# EAGLE board countdown_panelized (EAGLE 9.6.1)
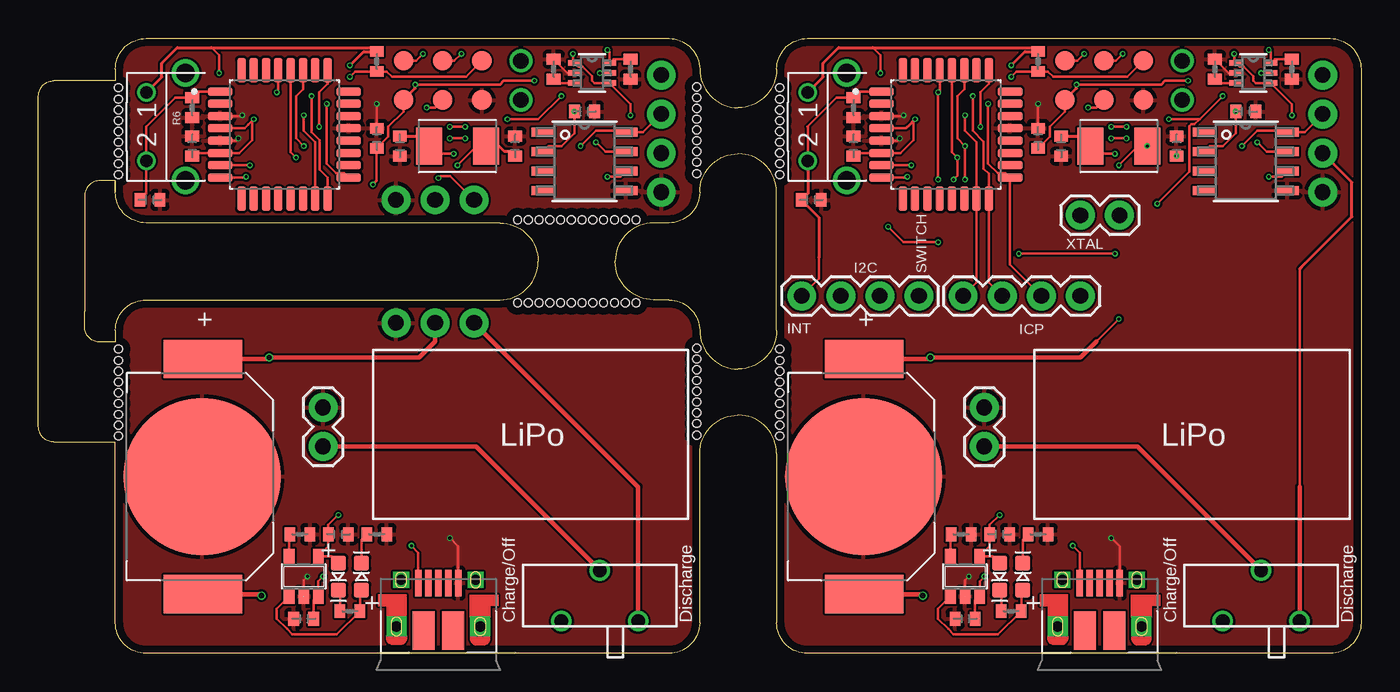
[diagram p0: board, top side]
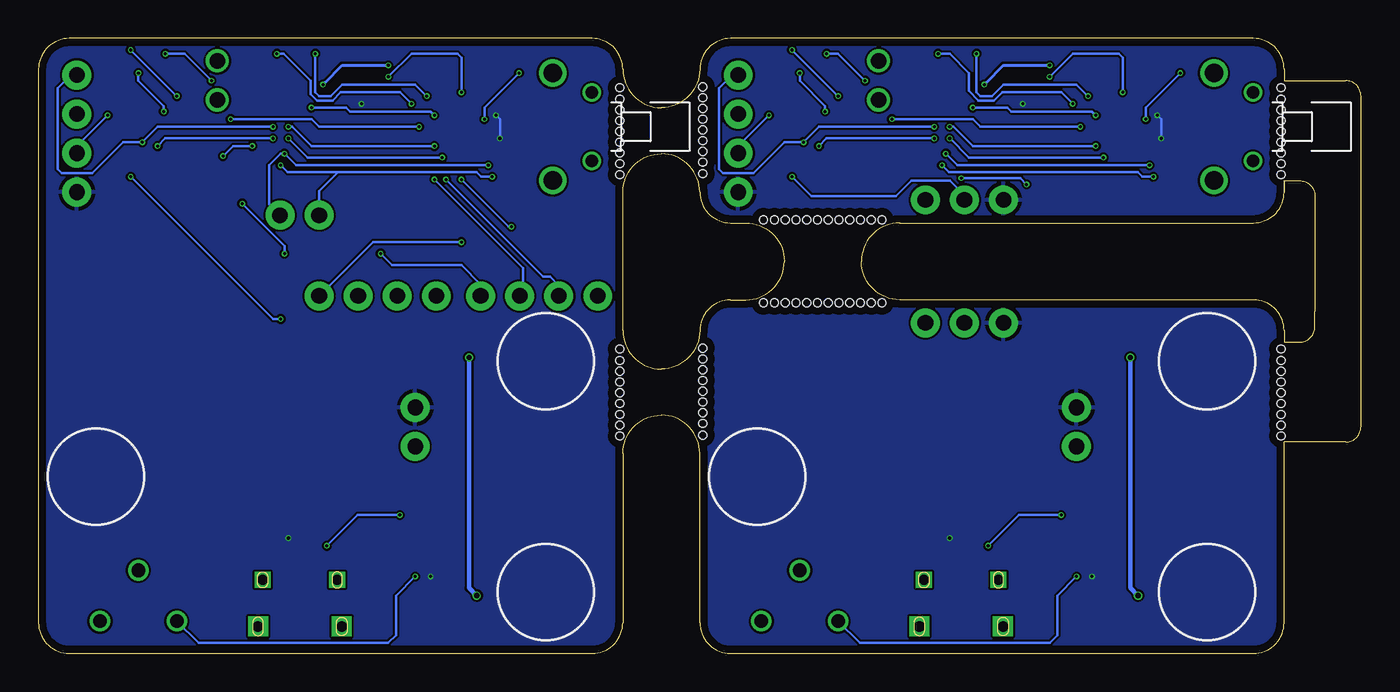
[diagram p1: board, bottom side, seen from below]

Size 86 x 40 mm. Coordinates in mm from the lower left corner, seen from the top.
Outline: 5,30 arc90 7,28 30,28 arc-90 32.5,25.5 arc-90 30,23 7,23 arc90 5,21 5,20.25 4,20.25 arc-90 3,21.25 3,22.25 3,29 3,29.75 arc-90 4,30.75 5,30.75
Outline: 5,30 5,30.75
Outline: 5,30.75 5,30
Outline: 48,30 arc90 45.5,32.5 arc90 43,30 arc-90 41,28 40,28 arc90 37.5,25.5 arc90 40,23 41,23 arc-90 43,21 arc90 45.5,18.5 arc90 48,21 48,30
Outline: 48,38 arc-90 45.5,35.5 arc-90 43,38 arc90 41,40 7,40 arc90 5,38 5,37.25 1,37.25 arc90 0,36.25 0,14.75 arc90 1,13.75 5,13.75 5,2 arc90 7,0 41,0 arc90 43,2 43,13 arc-90 45.5,15.5 arc-90 48,13 48,2 arc90 50,0 84,0 arc90 86,2 86,21 86,38 arc90 84,40 50,40 arc90 48,38
Copper layers (1*16): Top 2mil / dielectric 9mil / Bottom 2mil
Design rules "scono": minimum track width 3.5mil, minimum drill 0.2mm, track to track 5.5mil, track to pad 5.5mil, pad to pad 5.5mil, via to via 5.5mil, smd to smd 0mil, copper to edge 0.5mm, drill to drill 0.5mm, minimum pad ring 3mil, minimum via ring 3mil, stop-mask expansion 3mil, vias tented up to drill 0mil, thermal gap 10mil
Holes 0.5 mm at 48.2,36.05 48.2,33.25 48.2,33.95 48.2,34.65 48.2,35.35 48.2,32.55 48.2,31.15 48.2,31.85 48.2,36.8 42.8,31.95 42.8,34.75 42.8,34.05 42.8,33.35 42.8,32.65 42.8,35.45 42.8,36.85 42.8,36.15 42.8,31.2 33.25,28.2 32.55,28.2 31.85,28.2 31.15,28.2 33.95,28.2 36.75,28.2 36.05,28.2 35.35,28.2 34.65,28.2 37.45,28.2 38.85,28.2 38.15,28.2 36.75,22.8 37.45,22.8 38.15,22.8 38.85,22.8 36.05,22.8 33.25,22.8 33.95,22.8 34.65,22.8 35.35,22.8 32.55,22.8 31.15,22.8 31.85,22.8 48.2,19.05 48.2,16.25 48.2,16.95 48.2,17.65 48.2,18.35 48.2,15.55 48.2,14.15 48.2,14.85 48.2,19.8 42.8,14.95 42.8,17.75 42.8,17.05 42.8,16.35 42.8,15.65 42.8,18.45 42.8,19.85 42.8,19.15 42.8,14.2 5.2,36.05 5.2,33.25 5.2,33.95 5.2,34.65 5.2,35.35 5.2,32.55 5.2,31.15 5.2,31.85 5.2,36.8 5.2,19.05 5.2,16.25 5.2,16.95 5.2,17.65 5.2,18.35 5.2,15.55 5.2,14.15 5.2,14.85 5.2,19.8

## Footprints (pad centres in the part's own frame; a part is rotated, then mirrored left to right if it is on the bottom)
BAT_BK-916-TR = smd 2.5 x 5.1: 1 -7.65,0.05; 2 7.65,0.05 | smd 10.2 x 10.2: 3 0,0
0402-CAP = smd 0.7 x 0.9: 1 -0.65,0; 2 0.65,0
LED-0603 = smd 1 x 1: A 0.877,0; C -0.877,0
BURNIN = smd 1.27 x 1.27 bottom: 3.3V 0,0; GND -5.08,0; MISO 0,2.54; MOSI -2.54,0; RST -5.08,2.54; SCK -2.54,2.54 | drill 1: P$7 -7.62,2.54; P$8 -7.62,0
FCI_10103594-0001LF = smd 0.4 x 1.75: 1 -1.3,2.825; 2 -0.65,2.825; 3 0,2.825; 4 0.65,2.825; 5 1.3,2.825 | smd 1.425 x 2.5: S1 -0.963,-0.25; S2 0.963,-0.25 | drill 0.65 pad 1.05 square: S3 -2.425,3.03; S4 2.425,3.03 | drill 0.7 pad 1.3 square: S5 -2.725,0; S6 2.725,0
1X02 = drill 1.016 pad 1.88: 1 0,0; 2 2.54,0
1X04_NO_SILK = drill 1.016 pad 1.88: 1 0,0; 2 2.54,0; 3 5.08,0; 4 7.62,0
1X03_NO_SILK = drill 1.016 pad 1.88: 1 0,0; 2 2.54,0; 3 5.08,0
1X04 = drill 1.016 pad 1.88: 1 0,0; 2 2.54,0; 3 5.08,0; 4 7.62,0
R0402 = smd 0.7 x 0.9: 1 -0.65,0; 2 0.65,0
FSMRACD = drill 1.2: GND1 0,3.81; GND2 6.985,3.81 | drill 0.8: P$1 1.27,1.27; P$2 5.715,1.27
SOIC-8 = smd 1.493 x 0.568: 1 -2.702,1.905; 2 -2.702,0.635; 3 -2.702,-0.635; 4 -2.702,-1.905; 5 2.702,-1.905; 6 2.702,-0.635; 7 2.702,0.635; 8 2.702,1.905
QFP80P900X900X120-32N = smd 1.6 x 0.55: 1 -4.18,2.8; 2 -4.18,2; 3 -4.18,1.2; 4 -4.18,0.4; 5 -4.18,-0.4; 6 -4.18,-1.2; 7 -4.18,-2; 8 -4.18,-2.8; 17 4.18,-2.8; 18 4.18,-2; 19 4.18,-1.2; 20 4.18,-0.4; 21 4.18,0.4; 22 4.18,1.2; 23 4.18,2; 24 4.18,2.8 | smd 0.55 x 1.6: 9 -2.8,-4.18; 10 -2,-4.18; 11 -1.2,-4.18; 12 -0.4,-4.18; 13 0.4,-4.18; 14 1.2,-4.18; 15 2,-4.18; 16 2.8,-4.18; 25 2.8,4.18; 26 2,4.18; 27 1.2,4.18; 28 0.4,4.18; 29 -0.4,4.18; 30 -1.2,4.18; 31 -2,4.18; 32 -2.8,4.18
SOT-23-5 = smd 0.69 x 0.99: 1 -0.95,-1.29; 2 0,-1.29; 3 0.95,-1.29; 4 0.95,1.3; 5 -0.95,1.3
SOT-363 = smd 0.845 x 0.365: 1 -1.134,0.65; 2 -1.134,0; 3 -1.134,-0.65; 4 1.134,-0.65; 5 1.134,0; 6 1.134,0.65
12C-12 = drill 0.9: 1 -2.5,1.65; 2 0,-1.65; 3 2.5,1.65
XTAL500X320X130N = smd 1.7 x 2.4: 1 -1.85,0; 2 1.85,0

## Placement (x,y rotation side)
BT1  BK-916-TR  [BAT_BK-916-TR]  10.65,11.5 270 top
BT2  BK-916-TR  [BAT_BK-916-TR]  53.65,11.5 270 top
C1  20pF  [0402-CAP]  23.5,33 90 top
C2  20pF  [0402-CAP]  31,33 270 top
C3  4.7uF  [0402-CAP]  17.25,2.25 0 top
C4  4.7uF  [0402-CAP]  19.5,7.75 180 top
C5  0.1uF  [0402-CAP]  22,33.5 270 top
C6  0.1uF  [0402-CAP]  10,33 270 top
C7  1uF  [0402-CAP]  35.5,35.25 180 top
C8  20pF  [0402-CAP]  66.5,33 90 top
C9  20pF  [0402-CAP]  74,33 270 top
C10  0.1uF  [0402-CAP]  65,33.5 270 top
C11  0.1uF  [0402-CAP]  53,33 270 top
C12  1uF  [0402-CAP]  78.5,35.25 180 top
C13  4.7uF  [0402-CAP]  60.25,2.25 0 top
C14  4.7uF  [0402-CAP]  62.5,7.75 180 top
C15  0.1uF  [0402-CAP]  7.25,29.5 180 top
C16  0.1uF  [0402-CAP]  50.25,29.5 180 top
D1  [LED-0603]  19.5,5 90 top
D2  [LED-0603]  21,5 270 top
D3  [LED-0603]  62.5,5 90 top
D4  [LED-0603]  64,5 270 top
J1  BURNIN  [BURNIN]  23.75,36 0 bottom
J2  USB  [FCI_10103594-0001LF]  26,1.75 0 top
J3  LiPo  [1X02]  18.5,16 270 top
J4  OLED  [1X04_NO_SILK]  40.5,30 90 top
J5  TOP  [1X03_NO_SILK]  23.25,29.5 0 top
J6  BASE  [1X03_NO_SILK]  23.25,21.5 0 top
J7  BURNIN  [BURNIN]  66.75,36 0 bottom
J8  OLED  [1X04_NO_SILK]  83.5,30 90 top
J9  [1X02]  67.75,28.5 0 top
J10  [1X04]  57.25,23.25 180 top
J11  [1X04]  67.75,23.25 180 top
J12  USB  [FCI_10103594-0001LF]  69,1.75 0 top
J13  LiPo  [1X02]  61.5,16 270 top
R1  330R  [R0402]  20.25,2.75 180 top
R2  51k  [R0402]  17,7.75 180 top
R3  1k  [R0402]  22,38.5 270 top
R4  10k  [R0402]  38.5,38 270 top
R5  10k  [R0402]  33.5,38 90 top
R6  10k  [R0402]  10,35.5 90 top
R7  330R  [R0402]  22,7.75 180 top
R8  1k  [R0402]  65,38.5 270 top
R9  10k  [R0402]  81.5,38 270 top
R10  10k  [R0402]  76.5,38 90 top
R11  10k  [R0402]  53,35.5 90 top
R12  330R  [R0402]  63.25,2.75 180 top
R13  51k  [R0402]  60,7.75 180 top
R14  330R  [R0402]  65,7.75 180 top
SW_INT  FSMRACD  [FSMRACD]  5.75,37.75 270 top
SW_INT1  FSMRACD  [FSMRACD]  48.75,37.75 270 top
U1  DS3231MZ+TRL_SOIC8  [SOIC-8]  35.5,32 0 top
U2  ATMEGA328P-AUR  [QFP80P900X900X120-32N]  16,33.75 0 top
U3  MCP73831T  [SOT-23-5]  17.25,5 0 top
U4  BL1551  [SOT-363]  36,37.75 0 top
U5  DS3231MZ+TRL_SOIC8  [SOIC-8]  78.5,32 0 top
U6  ATMEGA328P-AUR  [QFP80P900X900X120-32N]  59,33.75 0 top
U7  BL1551  [SOT-363]  79,37.75 0 top
U8  MCP73831T  [SOT-23-5]  60.25,5 0 top
U$1  CL-SB-12C-12  [12C-12]  36.5,3.75 180 top
U$2  CL-SB-12C-12  [12C-12]  79.5,3.75 180 top
Y1  [XTAL500X320X130N]  27.25,33 180 top
Y2  [XTAL500X320X130N]  70.25,33 180 top

## Library data of the parts
BT1 BT2 = scono; DESCRIPTION: Battery Retainer Coin, 12.0mm 1 Cell SMD _SMT_ Tab; DIGI-KEY_PART_NUMBER: BK-916-CT-ND; MF: MPD _Memory; MP: BK-916-TR; PACKAGE: MSOP-12 Memory Protection Devices
C1-C16 = scono; PIE-INT-REF-NUM: CAPACITOR-GENERIC
D1-D4 J1 J3 J5-J7 J9 J13 R1-R14 U1 U3-U5 U7 U8 U$1 U$2 Y1 Y2 = scono
J2 J12 = scono; DESCRIPTION: Micro Usb, 2.0 Type b, Receptacle, Smt; DIGI-KEY_PART_NUMBER: 609-4050-1-ND; DIGI-KEY_PURCHASE_URL: https://www.digikey.com/product-detail/en/amphenol-icc-fci/10103594-0001LF/609-4050-1-ND/2350357?utm_source=snapeda&utm_medium=aggregator&utm_campaign=symbol; MF: Amphenol ICC; MP: 10103594-0001LF; PACKAGE: None
J4 J8 J10 J11 = scono; PROD_ID: CONN-09696
SW_INT SW_INT1 = scono; COMMENT: 9-1437565-9; CONFIGURATION_POLE-THROW: Single Pole - Single Throw; CONTACT_CURRENT_RATING: 50 mA; DESCRIPTION: Tactile Switch SPST-NO Side Actuated Through Hole, Right Angle; DIGI-KEY_PART_NUMBER: 450-1178-ND; DIGIKEY-PURCHASE-URL: https://snapeda.com/shop?store=DigiKey&id=1919694; EU_ROHS_COMPLIANCE: Compliant; MF: TE Connectivity; MP: FSMRACD; PACKAGE: None
U2 U6 = scono; DESCRIPTION: ATmega328P Series 8 Bit 2 kB RAM 32 kB Flash SMT Microcontroller - TQFP-32; DIGI-KEY_PART_NUMBER: ATMEGA328P-AURCT-ND; DIGI-KEY_PURCHASE_URL: https://www.digikey.com/product-detail/en/microchip-technology/ATMEGA328P-AUR/ATMEGA328P-AURCT-ND/3789455?utm_source=snapeda&utm_medium=aggregator&utm_campaign=symbol; MF: Microchip; MP: ATMEGA328P-AUR; PACKAGE: TQFP-32 Microchip

## Nets
AREF: U2.20
AREF1: U6.20
AVCC: U2.18
AVCC1: U6.18
BAT+: J3.2 U$1.2
BAT+1: J13.2 U$2.2
EN_CLK: R4.1 U2.25 U4.6
EN_CLK1: J10.1 R9.1 U6.25 U7.6
GND: BT2.3 C8.1 C9.1 C10.1 C11.1 C12.1 C13.1 C14.1 C16.1 J7.GND J8.1 J12.5 J13.1 R9.2 R10.2 R11.1 R13.1 R14.1 U5.5 U6.3 U6.5 U6.21 U7.2 U8.2
GND_BOT: BT1.3 C3.1 C4.1 J2.5 J3.1 J6.1 R2.1 R7.1 U3.2
GND_TOP: C1.1 C2.1 C5.1 C6.1 C7.1 C15.1 J1.GND J4.1 J5.1 R4.2 R5.2 R6.1 U1.5 U2.3 U2.5 U2.21 U4.2
INT_WAKE: C15.2 R6.2 SW_INT.P$2 U2.1
INT_WAKE1: C16.2 J10.4 R11.2 SW_INT1.P$2 U6.1
MISO: J1.MISO U2.16
MISO1: J7.MISO J11.3 U6.16
MOSI: J1.MOSI U2.15
MOSI1: J7.MOSI J11.4 U6.15
N$1: R5.1 U4.3
N$2: D2.C R7.2
N$3: R10.1 U7.3
N$4: D1.C R1.2
N$5: D3.C R12.2
N$6: D4.C R14.2
PROG: R2.2 U3.5
PROG1: R13.2 U8.5
RST: J1.RST R3.2 U2.29
RST1: J7.RST J11.1 R8.2 U6.29
SCK: J1.SCK U2.17
SCK1: J7.SCK J11.2 U6.17
SCL: J4.3 U1.8 U2.28
SCL1: J8.3 J10.3 U5.8 U6.28
SDA: J4.4 U1.7 U2.27
SDA1: J8.4 J10.2 U5.7 U6.27
STAT: D2.A R1.1 U3.1
STAT1: D4.A R12.1 U8.1
V_BAT: BT2.1 BT2.2 U5.6
V_BAT_BOT: BT1.1 BT1.2 J6.2
V_BAT_TOP: J5.2 U1.6
VBAT_CHARGE: C3.2 U3.3 U$1.3
VBAT_CHARGE1: C13.2 U8.3 U$2.3
VCC: C10.2 C11.2 J7.3.3V J8.2 R8.1 SW_INT1.P$1 U6.4 U6.6 U7.1 U7.4 U$2.1
VCC_BOT: J6.3 U$1.1
VCC_CLK: C7.2 U1.2 U4.5
VCC_CLK1: C12.2 U5.2 U7.5
VCC_TOP: C5.2 C6.2 J1.3.3V J4.2 J5.3 R3.1 SW_INT.P$1 U2.4 U2.6 U4.1 U4.4
VUSB: C4.2 D1.A J2.1 U3.4
VUSB1: C14.2 D3.A J12.1 U8.4
XTAL1: C1.2 U2.7 Y1.2
XTAL2: C2.2 U2.8 Y1.1
XTAL3: C9.2 J9.1 U6.8 Y2.1
XTAL4: C8.2 J9.2 U6.7 Y2.2

## Tracks (layer width: path | path; a pad name or v marks a point on that pad's centre or on a via)
BAT+
  Top 0.3: J3.2 28.44,13.46 U$1.2
BAT+1
  Top 0.3: J13.2 71.44,13.46 U$2.2
EN_CLK  (via drill 0.2)
  Top 0.152: R4.1 37.38,38.65 U4.6 37.13,39.12 v37,39.25 | v34,36.25 32.5,34.75 v30.5,34.75 | U2.25 18.8,37.05 18.25,36.5 v18.25,34.25
  Bottom 0.152: v37,39.25 v34,36.25 | v30.5,34.75 25.25,34.75 24.75,34.25 v18.25,34.25
EN_CLK1  (via drill 0.2)
  Top 0.152: R9.1 80.38,38.65 U7.6 80.13,39.12 v80,39.25 | v77,36.25 75.5,34.75 | 75.5,34.75 74.75,34.75 v73.5,34.75 | U6.25 61.8,37.05 61.25,36.5 v61.25,34.25 | 75.5,34.75 75.17,34.42 74.96,34.42 74.82,34.28 74.82,31.32 v72.75,29.25 | v70,26 v63.75,26
  Bottom 0.152: v80,39.25 v77,36.25 | v73.5,34.75 68.25,34.75 67.75,34.25 v61.25,34.25 | v72.75,29.25 70,26.5 v70,26 | v63.75,26 63,25.25 58.5,25.25 57.25,24 J10.1
GND  (via drill 0.2)
  Top 0.152: C10.1 v65,35.75 | U7.2 77.4,37.75 R10.2 | U6.5 55.85,33.35 v56,33.5 | v56.25,35 56.2,34.95 U6.3 | J12.5 70.3,6.95 v69.75,7.5 | v60.5,5 60.25,4.75 U8.2
  Bottom 0.152: v56,33.5 56,34.75 v56.25,35
  pour Bottom: 48,40 86,40 86,0 48,0
  pour Top: 48,40 86,40 86,0 48,0
GND_BOT  (via drill 0.2)
  Top 0.152: J2.5 27.3,6.95 v26.75,7.5 | v17.5,5 17.25,4.75 U3.2
  pour Bottom: 5,23 43,23 43,0 5,0
  pour Top: 5,23 43,23 43,0 5,0
GND_TOP  (via drill 0.2)
  Top 0.152: C5.1 v22,35.75 | U4.2 34.4,37.75 R5.2 | U2.5 12.85,33.35 v13,33.5 | v13.25,35 13.2,34.95 U2.3
  Bottom 0.152: v13,33.5 13,34.75 v13.25,35
  pour Bottom: 5,40 43,40 43,28 5,28
  pour Top: 5,40 43,40 43,28 5,28
INT_WAKE
  Top 0.152: U2.1 10.4,36.55 R6.2 8.9,36.15 7,34.25 7.02,34.23 SW_INT.P$2 7.02,29.92 C15.2
INT_WAKE1
  Top 0.152: SW_INT1.P$2 50.02,34.23 50,34.25 51.9,36.15 R11.2 53.4,36.55 U6.1 | 50.75,25.75 50.75,24.37 J10.4
  Top 0.2: SW_INT1.P$2 50.02,29.92 C16.2 50.75,28.35 50.75,25.75
MISO  (via drill 0.2)
  Top 0.152: J1.MISO 24.54,38.54 v25,39 | U2.16 18.8,30.95 18.29,31.46 18.29,33.37 17.75,33.91 v17.75,36.25
  Bottom 0.152: v17.75,36.25 18.5,37 23.25,37 24,36.25 24.75,36.25 25,36.5 v25,39
MISO1  (via drill 0.2)
  Top 0.152: J7.MISO 67.54,38.54 v68,39 | v60.75,36.25 60.75,34 61.46,33.29 61.46,31.54 61.8,31.2 U6.16 61.8,24.12 J11.3
  Bottom 0.152: v60.75,36.25 61.5,37 66.25,37 67,36.25 67.75,36.25 68,36.5 v68,39
MOSI  (via drill 0.2)
  Top 0.152: J1.MOSI 25.79,35.5 v25.25,35.5 | U2.15 18,33.25 17.25,34 v17.25,35
  Bottom 0.152: v17.25,35 17.5,35.25 22.75,35.25 23,35.5 v25.25,35.5
MOSI1  (via drill 0.2)
  Top 0.152: J7.MOSI 68.79,35.5 v68.25,35.5 | v60.25,35 60.25,34 61,33.25 U6.15 61,24.12 J11.4
  Bottom 0.152: v60.25,35 60.5,35.25 65.75,35.25 66,35.5 v68.25,35.5
N$1
  Top 0.152: U4.3 33.75,37.1 R5.1
N$2
  Top 0.152: D2.C 21,7.4 R7.2
N$3
  Top 0.152: U7.3 76.75,37.1 R10.1
N$4
  Top 0.152: D1.C 19.56,4.06 19.6,4.02 R1.2
N$5
  Top 0.152: D3.C 62.56,4.06 62.6,4.02 R12.2
N$6
  Top 0.152: D4.C 64,7.4 R14.2
PROG
  Top 0.152: R2.2 16.3,7.7 U3.5
PROG1
  Top 0.152: R13.2 59.3,7.7 U8.5
RST  (via drill 0.2)
  Top 0.152: U2.29 15.6,36.6 v15.5,36.5 | v20.25,37.5 20.6,37.85 R3.2 22.65,37.85 23,37.5 24.28,37.5 24.29,37.51 24.71,37.51 24.72,37.5 27.79,37.5 J1.RST
  Bottom 0.152: v15.5,36.5 15.5,38.75 15.75,39 18.75,39 v20.25,37.5
RST1  (via drill 0.2)
  Top 0.152: U6.29 58.6,36.6 v58.5,36.5 v58.5,30.83 | v63.25,37.5 63.6,37.85 R8.2 65.65,37.85 66,37.5 67.28,37.5 67.29,37.51 67.71,37.51 67.72,37.5 70.79,37.5 J7.RST | v55.25,27.75 56.25,26.75 v58.5,26.75
  Bottom 0.152: v58.5,36.5 58.5,38.75 58.75,39 61.75,39 v63.25,37.5 | v58.5,30.83 55.42,27.75 v55.25,27.75 | J11.1 64.25,26.75 v58.5,26.75
SCK  (via drill 0.2)
  Top 0.152: J1.SCK 27.04,38.54 v27.5,39 | U2.17 19.89,31.25 19.37,31.25 18.75,31.86 v18.75,35.75
  Bottom 0.152: v18.75,35.75 19.5,36.5 23.34,36.5 23.88,35.96 24.87,35.96 25.5,36.59 25.5,37.75 26.75,39 v27.5,39
SCK1  (via drill 0.2)
  Top 0.152: J7.SCK 70.04,38.54 v70.5,39 | v61.75,35.75 61.75,31.86 62.37,31.25 62.88,31.25 U6.17 63.18,25.28 J11.2
  Bottom 0.152: v61.75,35.75 62.5,36.5 66.34,36.5 66.88,35.96 67.87,35.96 68.29,36.38 68.29,37.25 70.04,39 v70.5,39
SCL  (via drill 0.2)
  Top 0.152: J4.3 39.33,33.91 U1.8 38.11,34 36.25,34 v35.25,33 | U2.28 16.4,32.6 v16.75,32.25 | v26.75,33.5 v27.75,33.5
  Bottom 0.152: v16.75,32.25 25.5,32.25 v26.75,33.5 | v27.75,33.5 34.75,33.5 v35.25,33
SCL1  (via drill 0.2)
  Top 0.152: J8.3 82.33,33.91 U5.8 81.11,34 79.25,34 v78.25,33 | U6.28 59.4,32.6 v59.75,32.25 59.75,31.08 v59.5,30.83 | v69.75,33.5 v70.75,33.5
  Bottom 0.152: v59.75,32.25 68.5,32.25 v69.75,33.5 | v70.75,33.5 77.75,33.5 v78.25,33 | v59.5,30.83 53.17,24.5 52.75,24.5 52.17,23.92 J10.3
SDA  (via drill 0.2)
  Top 0.152: U1.7 36.87,32.63 v36.25,33.25 | U2.27 17.2,36.7 16.75,36.25 16.75,33.5 v17.25,33 | v26.75,34.25 v27.75,34.25
  Bottom 0.152: J4.4 40.88,37.62 41.75,36.75 41.75,31.5 41.5,31.25 39.5,31.25 37.5,33.25 v36.25,33.25 35.25,34.25 v27.75,34.25 | v17.25,33 25.25,33 26.5,34.25 v26.75,34.25
SDA1  (via drill 0.2)
  Top 0.152: U5.7 79.86,32.63 v79.25,33.25 | U6.27 60.2,36.7 59.75,36.25 59.75,33.5 v60.25,33 v60.25,30.83 | v69.75,34.25 v70.75,34.25
  Bottom 0.152: J8.4 83.88,37.62 84.75,36.75 84.75,31.5 84.5,31.25 82.5,31.25 80.5,33.25 v79.25,33.25 78.25,34.25 v70.75,34.25 | v60.25,33 68.25,33 69.5,34.25 v69.75,34.25 | v60.25,30.83 54.5,25.08 54.5,23.46 J10.2
STAT
  Top 0.152: U3.1 15.5,2.91 15.5,2.25 16.16,1.58 16.17,1.58 16.5,1.25 19.4,1.25 R1.1 20.9,4.02 D2.A
STAT1
  Top 0.152: U8.1 58.5,2.91 58.5,2.25 59.16,1.58 59.17,1.58 59.5,1.25 62.4,1.25 R12.1 63.9,4.02 D4.A
V_BAT  (via drill 0.2, 0.35)
  Top 0.152: U5.6 80.84,31 v80,31 | 68.79,20.29 v70.25,21.75
  Top 0.3: BT2.1 57.9,19.15 v58,19.25 67.75,19.25 68.79,20.29 | BT2.2 57.4,3.85 v57.5,3.75
  Bottom 0.152: v70.25,21.75 70.75,21.75 v80,31
  Bottom 0.3: v58,19.25 58,4.25 v57.5,3.75
V_BAT_BOT  (via drill 0.35)
  Top 0.3: BT1.1 14.9,19.15 v15,19.25 24.75,19.25 25.79,20.29 J6.2 | BT1.2 14.4,3.85 v14.5,3.75
  Bottom 0.3: v15,19.25 15,4.25 v14.5,3.75
V_BAT_TOP  (via drill 0.2)
  Top 0.152: U1.6 37.84,31 v37,31
  Bottom 0.152: v37,31 35.75,29.75 30.25,29.75 29.25,30.75 26.75,30.75 25.79,29.79 J5.2
VBAT_CHARGE  (via drill 0.2)
  Top 0.152: U3.3 18.2,3.75 | 18.2,3.75 18.2,4.7 v18.5,5 | C3.2 17.9,3.45 18.2,3.75
  Bottom 0.152: v18.5,5 19.75,3.75 19.75,1.18 20.25,0.68 32.58,0.68 U$1.3
VBAT_CHARGE1  (via drill 0.2)
  Top 0.152: U8.3 61.2,3.75 | 61.2,3.75 61.2,4.7 v61.5,5 | C13.2 60.9,3.45 61.2,3.75
  Bottom 0.152: v61.5,5 62.75,3.75 62.75,1.18 63.25,0.68 75.58,0.68 U$2.3
VCC  (via drill 0.2)
  Top 0.152: 54.25,39.4 54.75,38.9 v54.75,37.75 | v57,34.75 56.9,34.65 | 56.9,34.65 56.65,34.4 56.4,34.15 U6.4 | 56.9,34.65 56.9,33.4 56.05,32.55 U6.6 53.2,32.55 C11.2 | v81.5,35 81.5,35.73 U7.4 79.15,37.1 79,37.25 79,37.55 78.38,38.16 78.1,38.16 U7.1 77.75,38.52 v77.75,39 | v67.5,37 73,37 73.25,37.25 v74.75,37.25 | C10.2 65.75,33.6 65.75,34.25 66.75,35.25 J7.3.3V | 82,10.83 82,25 82.12,25.12
  Top 0.2: SW_INT1.P$1 51.02,37.48 51.02,38.39 52.03,39.4 54.25,39.4 64.75,39.4 R8.1 64.15,39.15 v63.25,38.25 | J7.3.3V 67.5,36.75 v67.5,37 | 82,25 82.12,25.12 85.4,28.4 85.4,30.64 J8.2
  Top 0.3: U$2.1 82,10.83
  Bottom 0.152: v54.75,37.75 57,35.5 v57,34.75 | v81.5,35 83.5,33 J8.2 | v74.75,37.25 76.5,39 v77.75,39
  Bottom 0.2: v67.5,37 67.38,37.12 66.25,38.25 v63.25,38.25
VCC_BOT
  Top 0.3: U$1.1 39,10.83 J6.3
VCC_CLK  (via drill 0.2)
  Top 0.152: U1.2 33.16,33 34,33 34.85,33.85 C7.2 | v36.5,37.75 U4.5
  Bottom 0.152: C7.2 34.85,35.6 36.5,37.25 v36.5,37.75
  other vias: 34.85,35.25
VCC_CLK1  (via drill 0.2)
  Top 0.152: U5.2 76.16,33 77,33 77.85,33.85 C12.2 | v79.5,37.75 U7.5
  Bottom 0.152: C12.2 77.85,35.6 79.5,37.25 v79.5,37.75
  other vias: 77.85,35.25
VCC_TOP  (via drill 0.2)
  Top 0.152: J5.3 26.77,31.06 26.14,31.06 v26,30.91 | 11.25,39.4 11.75,38.9 v11.75,37.75 | v14,34.75 13.9,34.65 | 13.9,34.65 13.65,34.4 13.4,34.15 U2.4 | 13.9,34.65 13.9,33.4 13.05,32.55 U2.6 10.2,32.55 C6.2 | v38.5,35 38.5,35.73 U4.4 36.15,37.1 36,37.25 36,37.55 35.38,38.16 35.1,38.16 U4.1 34.75,38.52 v34.75,39 | v24.5,37 30,37 30.25,37.25 v32.25,37.25 | J1.3.3V 23.75,35.25 22.75,34.25 22.75,33.6 C5.2 22,31.5 22,30.75 v21.75,30.5
  Top 0.2: SW_INT.P$1 8.02,37.48 8.02,38.39 9.03,39.4 11.25,39.4 21.75,39.4 R3.1 21.15,39.15 v20.25,38.25 | J1.3.3V 24.5,36.75 v24.5,37
  Bottom 0.152: v11.75,37.75 14,35.5 v14,34.75 | v38.5,35 40.5,33 J4.2 | v32.25,37.25 34,39 v34.75,39 | v26,30.91 22.16,30.91 v21.75,30.5
  Bottom 0.2: v24.5,37 24.38,37.12 23.25,38.25 v20.25,38.25
VUSB  (via drill 0.2)
  Top 0.152: v19.5,9 18.85,8.35 C4.2 18.85,6.95 U3.4 19.08,6.3 D1.A | J2.1 24.7,6.55 v24.25,7
  Bottom 0.152: v19.5,9 22.25,9 v24.25,7
VUSB1  (via drill 0.2)
  Top 0.152: v62.5,9 61.85,8.35 C14.2 61.85,6.95 U8.4 62.08,6.3 D3.A | J12.1 67.7,6.55 v67.25,7
  Bottom 0.152: v62.5,9 65.25,9 v67.25,7
XTAL1  (via drill 0.2)
  Top 0.152: v27,32.5 25.9,32.5 Y1.2 | U2.7 v13.75,31.75
  Top 0.2: C1.2 24.75,33.65 Y1.2
  Bottom 0.152: v27,32.5 26.25,31.75 v13.75,31.75
XTAL2  (via drill 0.2)
  Top 0.152: U2.8 13.45,30.95 v13.5,31 | v27.25,31.75 28.5,33 Y1.1
  Top 0.2: Y1.1 29.95,33 30.29,32.66 30.69,32.66 C2.2
  Bottom 0.152: v27.25,31.75 26.81,31.31 14.52,31.31 14.22,31 v13.5,31
XTAL3  (via drill 0.2)
  Top 0.152: U6.8 56.45,30.95 v56.5,31 | v70.25,31.75 71.5,33 Y2.1
  Bottom 0.152: v70.25,31.75 69.81,31.31 66.5,31.31 | 66.5,31.31 58.5,31.31 57.52,31.31 57.22,31 v56.5,31 | J9.1 67.75,30.06 66.5,31.31 | C9.2 73.35,33 Y2.1
  other vias: 74,32.35 72.1,33
XTAL4  (via drill 0.2)
  Top 0.152: v70,32.5 68.9,32.5 Y2.2 | U6.7 v56.75,31.75
  Top 0.2: C8.2 67.75,33.65 Y2.2
  Bottom 0.152: v56.75,31.75 69.25,31.75 v70,32.5 70.25,32.5 71,31.75 71,29.21 J9.2

## Text on the board
tPlace: XTAL | I2C | SWITCH | INT | ICP | LiPo | LiPo | Charge/Off | Discharge | Charge/Off | Discharge